# EAGLE board Tubes (EAGLE 3.55)

No outline drawn. Coordinates in mm, seen from the top.
Copper layers used: 

## Footprints (pad centres in the part's own frame; a part is rotated, then mirrored left to right if it is on the bottom)
F8 = drill 1.016 pad 1.778 octagon:  -3.759,0;  -1.245,0;  8.763,0;  1.245,0;  3.759,0;  6.248,0;  -6.248,0;  -8.763,0
F9 = drill 1.016 pad 1.778 octagon:  -5.004,0;  -2.489,0;  7.493,0;  0,0;  2.489,0;  5.004,0;  10.008,0;  -7.493,0;  -10.008,0
TBA4 = drill 1.397 pad 3.81 offset:  -7.62,2.54;  -2.54,2.54;  7.62,2.54;  2.54,2.54
TBA7 = drill 1.397 pad 3.81 offset:  -15.24,2.54;  -10.16,2.54;  15.24,2.54;  -5.08,2.54;  0,2.54;  10.16,2.54;  5.08,2.54
TBA8 = drill 1.397 pad 3.81 offset:  -17.78,2.54;  -12.7,2.54;  17.78,2.54;  -7.62,2.54;  -2.54,2.54;  12.7,2.54;  2.54,2.54;  7.62,2.54
TBA9 = drill 1.397 pad 3.81 offset:  -20.32,2.54;  -15.24,2.54;  20.32,2.54;  -10.16,2.54;  -5.08,2.54;  15.24,2.54;  0,2.54;  5.08,2.54;  10.16,2.54
TBV4 = drill 1.397 pad 3.81 offset:  -7.62,0;  -2.54,0;  2.54,0;  7.62,0
TBV7 = drill 1.397 pad 3.81 offset:  -15.24,0;  -10.16,0;  -5.08,0;  0,0;  5.08,0;  10.16,0;  15.24,0
TBV8 = drill 1.397 pad 3.81 offset:  -17.78,0;  -12.7,0;  -7.62,0;  -2.54,0;  2.54,0;  7.62,0;  12.7,0;  17.78,0
TBV9 = drill 1.397 pad 3.81 offset:  -20.32,0;  -15.24,0;  -10.16,0;  -5.08,0;  0,0;  5.08,0;  10.16,0;  15.24,0;  20.32,0
VAL = drill 1.422 pad 2.54 round:  -5.207,-6.731;  5.207,-6.858;  -8.127,-2.611;  -8.004,3.02;  -5.004,7.024;  0,8.524;  5.258,6.77;  8.254,-2.484;  8.004,2.893
VAL1 = drill 1.016 pad 2.54 round:  2.75,-8.85;  7.5,-5.5;  9.25,0;  3.25,8.65;  7.5,5.5;  -2.75,8.85;  -7.5,5.5;  -9.25,0.25;  -7.65,-5.25 | drill 1.016 pad 2.54 octagon:  2.75,-1.75
TAL = drill 1.27 pad 2.54 round:  3.81,-8.89;  -8.89,-3.81;  -3.81,8.89;  3.81,8.89;  8.89,3.81;  8.89,-3.81;  -3.81,-8.89;  -8.89,3.81
TAL1 = drill 1.27 pad 2.54 round:  0,-13;  0,13;  13,0;  -13,0;  -9,9;  -9,-9;  9,-9;  9,9
1000 = drill 0.813 pad 1.397 octagon: " 3.81,2.54;  -1.27,5.08;  1.27,5.08;  -1.27,2.54;  -1.27,0;  -1.27,-2.54;  -1.27,-5.08;  1.27,2.54;  1.27,0;  1.27,-2.54;  1.27,-5.08;  3.81,0;  3.81,-2.54;  -3.81,2.54;  -3.81,0;  -3.81,-2.54

## Placement (x,y rotation side)
MSF8  [F8]  19.05,243.84 0 top
MSF9  [F9]  54.61,243.84 0 top
MSTBA4  [TBA4]  17.78,201.93 0 top
MSTBA7  [TBA7]  55.88,201.93 0 top
MSTBA8  [TBA8]  102.87,201.93 0 top
MSTBA9  [TBA9]  156.21,201.93 0 top
MSTBV4  [TBV4]  17.78,224.79 0 top
MSTBV7  [TBV7]  55.88,224.79 0 top
MSTBV8  [TBV8]  102.87,224.79 0 top
MSTBV9  [TBV9]  156.21,224.79 0 top
NOVAL  [VAL]  22.86,124.46 0 top
NOVAL1  [VAL1]  58.42,124.46 0 top
OKTAL  [TAL]  22.86,167.64 0 top
OKTAL1  [TAL1]  58.42,167.64 0 top
TQFP1  [-35SC]  0,0 0 top
ZM1000  [1000]  22.86,90.17 0 top

## Library data of the parts
MSF8 MSF9 MSTBA4 MSTBA7-MSTBA9 MSTBV4 MSTBV7-MSTBV9 NOVAL NOVAL1 OKTAL OKTAL1 ZM1000 = tube
TQFP1 = BLATT